# Altium PCB 风火轮（单面）.PcbDoc (part 3 of 4)
Units mil, origin at the board's own origin, x right, y up, seen from the top; angles counter-clockwise.
Board outline 3937.01 x 3937.01 mil, 2 copper layers (Top Layer, Bottom Layer); 108 components, 81 nets, 448 pads, 132 vias.
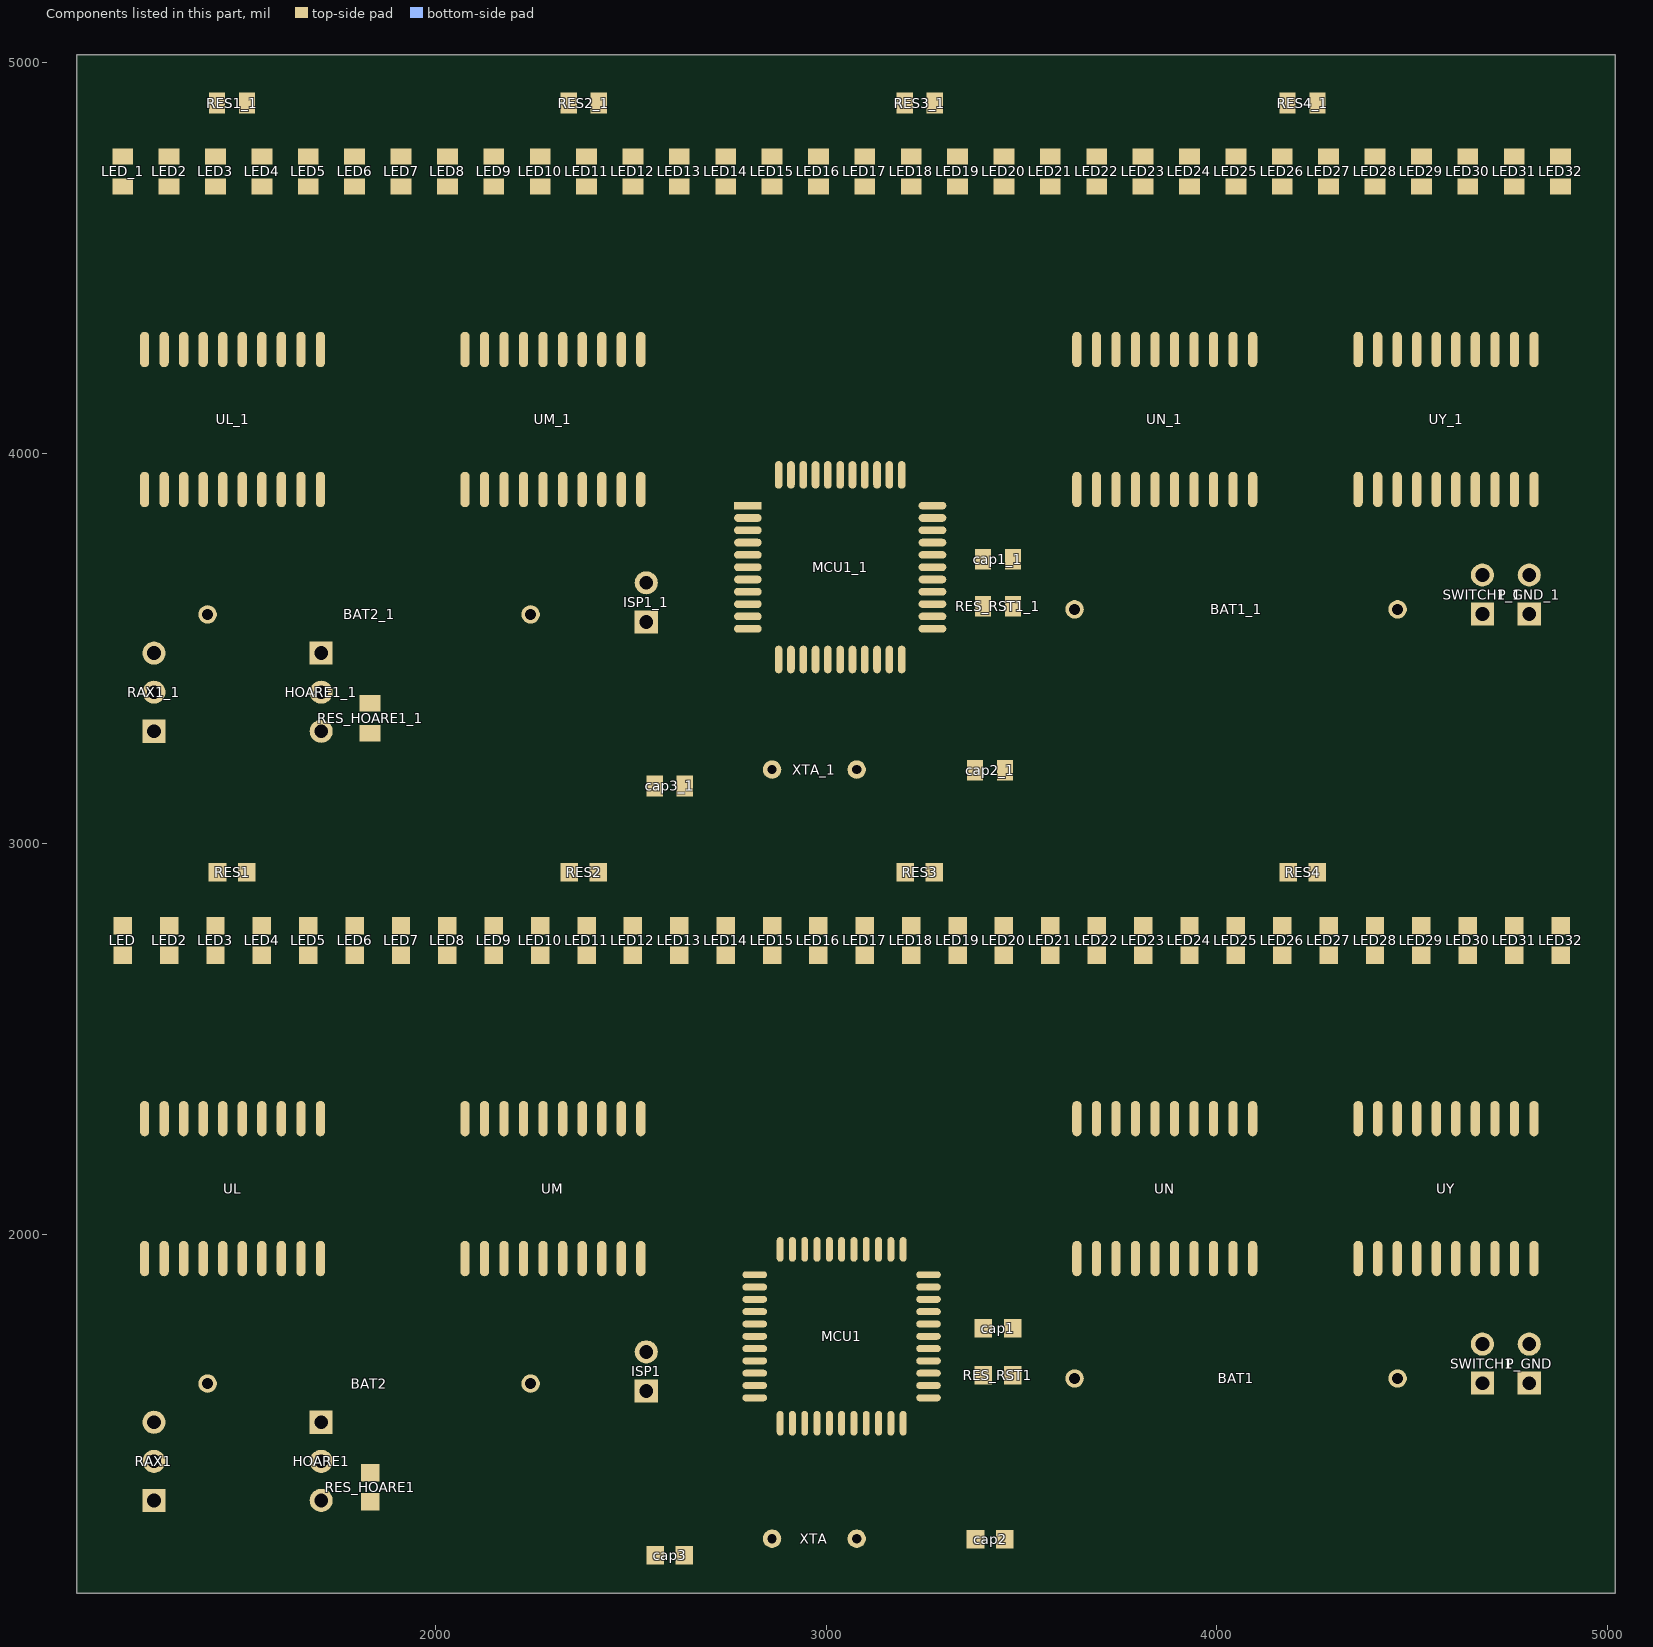
[diagram p3: the components of this part, seen from the top]

## Via types
v1: diameter 50, hole 28, Top Layer to Bottom Layer, 132 vias

## Nets (pads, with @x,y where several pads share a name; then routed paths per layer and width w, separated by ;. In a path a pad name is that pad's centre, name@x,y a point inside that pad or via, vN(x,y) a via of type N, cw(c..) or ccw(c..) an arc to the next point about the centre after c; other vN are vias at no path point) (continued)
copper on no net: | length 148539.7
  Top Layer w15: 2975.51,4037.69 2977.51,3965.53 ; 3008.5,3930.94 3008.5,4018.01
  Top Layer w20: 1200,4573.5 1200,4684.13 ; 1200,4758.94 1318.71,4758.94 1437.42,4758.94 1556.13,4758.94 1674.84,4758.94 1793.55,4758.94 1912.26,4758.94 2030.97,4758.94 ; 1442.6,4764.12 1442.6,4896.5 ; 1517.4,4896.5 1517.4,4985.5 ; v1(1695,3103.5) 2313,3103.5 v1(2416,3206.5) ; 1706,4265.64 1706,4363.5 v1(1712,4369.5) v1@1712,4360.5 ; 1708,3288.5 1829.06,3288.5 ; 1833,3436.5 1833,3359.37 2519.87,3359.37 2774.51,3614.02 2817.56,3614.02 ; 2076,3863.5 2076,3907.37 ; 2126,3907.37 2126,3983.5 ; 2149.68,4758.94 2268.39,4758.94 2387.1,4758.94 ; 2176,3907.37 2176,3982.36 2325.15,4131.5 2917.28,4131.5 2975.51,4073.27 2975.51,4037.69 ; 2226,3907.37 2226,3989.93 2337.57,4101.5 2904.85,4101.5 2942.87,4063.48 2942.87,3966.06 2947,3934.5 ; 2276,3907.37 2276,3997.5 2350,4071.5 2892.43,4071.5 2912.52,4051.41 2912.52,3942.5 ; 2326,3907.37 2326,4004.5 2360.48,4038.98 2838.52,4038.98 v1(2855.13,4022.38) 2874,4003.5 2874,3947.02 ; 2342.6,4896.5 2342.6,4803.44 2387.1,4758.94 ; 2377.14,3906.23 2376,3907.37 2376,4001.5 2383.48,4008.98 2638.37,4008.98 2690,3957.36 ; 2429.43,3970.93 2437.48,3978.98 2625.95,3978.98 2651,3953.93 2651,3897.93 2714.44,3834.49 ; 2476,3792.5 2484,3792.5 v1(2502,3774.5) ; v1@2498,3770.5 v1@2504,3764.5 ; 2505.87,3399.37 2750.51,3644.02 2816.06,3644.02 2817.56,3645.51 ; 2528,4267.64 v1(2528,4351.5) ; 2540,3568.5 2596,3568.5 2704.5,3677.01 2817.56,3677.01 ; 2540,3668.5 2600,3668.5 2671.5,3740 ; 2565.27,3133.21 2565.27,3114.23 2590.01,3089.5 3428.99,3089.5 3457.4,3117.91 3457.4,3243.1 3407,3293.5 ; 2666,3780.5 2688.49,3802.99 ; 2670.5,3133 2665.4,3138.1 ; 2733.52,3865.98 2690,3909.5 2690,3957.36 ; 2817.56,3771.5 2881.01,3771.5 v1(2887,3765.5) ; 2846,3130.5 2678.1,3130.5 2670.5,3138.1 ; 2866,3328.5 2943.5,3406.01 2943.5,3484.05 2945.51,3486.06 ; v1(2896,3857.5) 2914.02,3875.52 2914.02,3930.94 ; 2945.51,3930.94 2945.51,3801.99 v1(2950,3797.5) ; v1(2973,3577.5) 2973,3571.44 3008.5,3535.93 3008.5,3486.06 3008.5,3428 ; 2977.01,3385.5 2977.01,3486.06 ; 2977.01,3930.94 2977.01,3889.5 v1(3010,3856.5) ; 2977.51,3929.94 2977.51,3965.53 ; 2980.64,4758.94 2861.93,4758.94 2743.22,4758.94 2624.52,4758.94 2505.81,4758.94 2387.1,4758.94 ; 3008.5,4018.01 v1(3035,4044.5) ; v1(3021,3628.5) 3021,3565.86 3049.31,3537.56 ; 3051.95,3537.56 3066.01,3523.5 ; 3071.5,3486.06 3071.5,3523.5 ; 3078.54,3190.5 3080.54,3188.5 3082.54,3188.5 ; v1@3082,3562.86 3102.99,3541.87 3102.99,3486.06 ; 3082.54,3185.5 3082.54,3188.5 ; 3099.35,4758.94 3218.06,4758.94 3336.77,4758.94 3455.48,4758.94 3574.19,4758.94 3692.9,4758.94 3811.61,4758.94 3930.32,4758.94 ; 3134.49,3486.06 3134.49,3433.02 3155.5,3412 3555.5,3412 v1(3599,3368.5) ; 3168.62,3487.56 v1@3168.62,3584.5 ; 3202.6,4774.4 3202.6,4896.5 ; 3382.6,3188.5 3082.54,3188.5 ; 3391.1,3740 3402.6,3728.5 3402.6,4159.1 v1(3573,4329.5) ; 3402.6,3608.5 3521.6,3489.5 3610,3489.5 v1@3676,3423.5 ; 3459.4,3190.5 3596,3190.5 3680,3274.5 3680,3390.5 ; 3477.4,3608.5 3477.4,3728.5 ; 3523,3728.5 3477.4,3728.5 ; 3642,3907.37 3642,3656.42 3679.85,3618.57 3679.85,3399.35 ; 3742,3907.37 v1(3742,3760.5) 3737,3755.5 3737,3268.5 3897,3108.5 ; v1(3782,3661.5) 3792,3661.5 3792,3907.37 ; 3892,3301.5 3971,3222.5 4859.69,3222.5 4904.69,3267.5 4904.69,4067.82 4864,4108.5 4627,4108.5 4612,4093.5 4612,3907.37 ; 3947,3192.5 4876,3192.5 4934.69,3251.19 4934.69,4084.82 4881,4138.5 4582,4138.5 4562,4118.5 4562,3907.37 ; 3992,3907.37 v1(3992,3984.5) ; v1(4007,3368.5) 4753,3368.5 v1(4816,3431.5) ; 4049.03,4758.94 4167.74,4758.94 4286.45,4758.94 4405.16,4758.94 4523.87,4758.94 4642.58,4758.94 4761.29,4758.94 4880,4758.94 ; 4092,4265.64 v1(4092,4356.5) ; v1@4138,3328.5 v1(4816,3328.5) ; 4182.6,4773.8 4182.6,4896.5 ; 4219.96,4985.5 cw(c4219.96,4937.46) v1@4253.93,4971.43 ; 4262,4901.1 v1@4262,4964.5 ; 4462,3907.37 4462,4158.5 4502,4198.5 4965,4198.5 4994.69,4168.82 4994.69,3144.19 ; 4512,3907.37 4512,4147.5 4533,4168.5 4938,4168.5 4964.69,4141.82 4964.69,3235.62 4878.57,3149.5 ; 4662,3907.37 4662,4049.5 v1@4671.28,4058.78 ; v1(4668.43,4053.78) 4668.43,4055.93 v1@4671.28,4058.78 ; v1@4684,4071.5 v1@4671.28,4058.78 ; v1(4711,4011.5) 4711,4004.5 4712,3999.5 4712,3911.37 ; 4763,3916.37 v1@4763,4002.5 ; 4812,4265.64 4812,4347.5 ; v1@1705.61,3092.9 cw(c1731.21,3067.29) 1731.21,3103.5 ; v1@1705.61,3092.9 cw(c1731.21,3067.29) 1731.21,3103.5 ; v1@1705.61,3092.9 cw(c1731.21,3067.29) 1731.21,3103.5 ; v1@1705.61,3092.9 cw(c1731.21,3067.29) 1731.21,3103.5 ; v1@1705.61,3114.11 ccw(c1731.21,3139.72) 1731.21,3103.5 ; v1@1705.61,3114.11 ccw(c1731.21,3139.72) 1731.21,3103.5 ; v1@1705.61,3114.11 ccw(c1731.21,3139.72) 1731.21,3103.5 ; v1@1705.61,3114.11 ccw(c1731.21,3139.72) 1731.21,3103.5 ; 1706,4318.81 cw(c1762.7,4318.81) v1@1722.61,4358.9 ; 1706,4318.81 cw(c1762.7,4318.81) v1@1722.61,4358.9 ; 1706,4318.81 cw(c1762.7,4318.81) v1@1722.61,4358.9 ; 1706,4318.81 cw(c1762.7,4318.81) v1@1722.61,4358.9 ; 1718.27,3278.23 cw(c1743.07,3253.43) 1743.07,3288.5 ; 1718.27,3278.23 cw(c1743.07,3253.43) 1743.07,3288.5 ; 1718.27,3278.23 cw(c1743.07,3253.43) 1743.07,3288.5 ; 1718.27,3278.23 cw(c1743.07,3253.43) 1743.07,3288.5 ; 1718.27,3298.78 ccw(c1743.07,3323.58) 1743.07,3288.5 ; 1718.27,3298.78 ccw(c1743.07,3323.58) 1743.07,3288.5 ; 1718.27,3298.78 ccw(c1743.07,3323.58) 1743.07,3288.5 ; 1718.27,3298.78 ccw(c1743.07,3323.58) 1743.07,3288.5 ; 2390.39,3180.9 ccw(c2364.79,3206.5) v1@2401,3206.5 ; 2390.39,3180.9 cw(c2416,3155.29) v1@2416,3191.5 ; 2390.39,3180.9 ccw(c2364.79,3206.5) v1@2401,3206.5 ; 2390.39,3180.9 cw(c2416,3155.29) v1@2416,3191.5 ; 2390.39,3180.9 ccw(c2364.79,3206.5) v1@2401,3206.5 ; 2390.39,3180.9 cw(c2416,3155.29) v1@2416,3191.5 ; 2390.39,3180.9 ccw(c2364.79,3206.5) v1@2401,3206.5 ; 2390.39,3180.9 cw(c2416,3155.29) v1@2416,3191.5 ; v1@2517.39,4340.9 cw(c2491.79,4315.29) 2528,4315.29 ; v1@2517.39,4340.9 cw(c2491.79,4315.29) 2528,4315.29 ; v1@2517.39,4340.9 cw(c2491.79,4315.29) 2528,4315.29 ; v1@2517.39,4340.9 cw(c2491.79,4315.29) 2528,4315.29 ; 2528,4315.29 cw(c2564.21,4315.29) v1@2538.61,4340.9 ; 2528,4315.29 cw(c2564.21,4315.29) v1@2538.61,4340.9 ; 2528,4315.29 cw(c2564.21,4315.29) v1@2538.61,4340.9 ; 2528,4315.29 cw(c2564.21,4315.29) v1@2538.61,4340.9 ; 2539.34,3978.98 cw(c2539.34,3872.85) v1@2614.39,3947.9 ; 2539.34,3978.98 cw(c2539.34,3872.85) v1@2614.39,3947.9 ; 2539.34,3978.98 cw(c2539.34,3872.85) v1@2614.39,3947.9 ; 2539.34,3978.98 cw(c2539.34,3872.85) v1@2614.39,3947.9 ; 2553.81,3554.7 cw(c2587.14,3521.36) 2587.14,3568.5 ; 2553.81,3554.7 cw(c2587.14,3521.36) 2587.14,3568.5 ; 2553.81,3554.7 cw(c2587.14,3521.36) 2587.14,3568.5 ; 2553.81,3554.7 cw(c2587.14,3521.36) 2587.14,3568.5 ; 2553.81,3582.31 ccw(c2587.14,3615.65) 2587.14,3568.5 ; 2553.81,3582.31 ccw(c2587.14,3615.65) 2587.14,3568.5 ; 2553.81,3582.31 ccw(c2587.14,3615.65) 2587.14,3568.5 ; 2553.81,3582.31 ccw(c2587.14,3615.65) 2587.14,3568.5 ; 2553.81,3654.7 cw(c2587.14,3621.36) 2587.14,3668.5 ; 2553.81,3654.7 cw(c2587.14,3621.36) 2587.14,3668.5 ; 2553.81,3654.7 cw(c2587.14,3621.36) 2587.14,3668.5 ; 2553.81,3654.7 cw(c2587.14,3621.36) 2587.14,3668.5 ; 2553.81,3682.31 ccw(c2587.14,3715.65) 2587.14,3668.5 ; 2553.81,3682.31 ccw(c2587.14,3715.65) 2587.14,3668.5 ; 2553.81,3682.31 ccw(c2587.14,3715.65) 2587.14,3668.5 ; 2553.81,3682.31 ccw(c2587.14,3715.65) 2587.14,3668.5 ; 2557.34,3142.06 cw(c2538.17,3122.9) 2565.27,3122.9 ; 2557.34,3142.06 cw(c2538.17,3122.9) 2565.27,3122.9 ; 2557.34,3142.06 cw(c2538.17,3122.9) 2565.27,3122.9 ; 2557.34,3142.06 cw(c2538.17,3122.9) 2565.27,3122.9 ; 2569.14,3143.77 ccw(c2598.12,3128.03) 2574.8,3104.71 ; 2569.14,3143.77 ccw(c2598.12,3128.03) 2574.8,3104.71 ; 2569.14,3143.77 ccw(c2598.12,3128.03) 2574.8,3104.71 ; 2569.14,3143.77 ccw(c2598.12,3128.03) 2574.8,3104.71 ; 2587.63,3978.98 cw(c2587.63,3921.13) v1@2628.54,3962.04 ; 2587.63,3978.98 cw(c2587.63,3921.13) v1@2628.54,3962.04 ; 2587.63,3978.98 cw(c2587.63,3921.13) v1@2628.54,3962.04 ; 2587.63,3978.98 cw(c2587.63,3921.13) v1@2628.54,3962.04 ; 2641.86,3135.71 cw(c2652.94,3106.86) 2674.79,3128.71 ; 2641.86,3135.71 cw(c2652.94,3106.86) 2674.79,3128.71 ; 2641.86,3135.71 cw(c2652.94,3106.86) 2674.79,3128.71 ; 2641.86,3135.71 cw(c2652.94,3106.86) 2674.79,3128.71 ; 2648.8,3152.3 ccw(c2670.5,3161.78) 2670.5,3138.1 ; 2648.8,3152.3 ccw(c2670.5,3161.78) 2670.5,3138.1 ; 2648.8,3152.3 ccw(c2670.5,3161.78) 2670.5,3138.1 ; 2648.8,3152.3 ccw(c2670.5,3161.78) 2670.5,3138.1 ; 2649.44,3150.45 ccw(c2665.4,3154.59) 2665.4,3138.1 ; 2649.44,3150.45 ccw(c2665.4,3154.59) 2665.4,3138.1 ; 2649.44,3150.45 ccw(c2665.4,3154.59) 2665.4,3138.1 ; 2649.44,3150.45 ccw(c2665.4,3154.59) 2665.4,3138.1 ; 2649.44,3150.45 ccw(c2665.4,3154.59) 2665.4,3138.1 ; 2649.44,3150.45 ccw(c2665.4,3154.59) 2665.4,3138.1 ; 2649.44,3150.45 ccw(c2665.4,3154.59) 2665.4,3138.1 ; 2649.44,3150.45 ccw(c2665.4,3154.59) 2665.4,3138.1 ; 2665.4,3138.1 2639.4,3164.1 2639.4,3138.1 2665.4,3138.1 ; 2665.4,3138.1 2670.5,3138.1 ; 2690,3936.93 ccw(c2715.43,3936.93) v1@2714.89,3911.51 ; 2690,3936.93 ccw(c2715.43,3936.93) v1@2714.89,3911.51 ; 2690,3936.93 ccw(c2715.43,3936.93) v1@2714.89,3911.51 ; 2690,3936.93 ccw(c2715.43,3936.93) v1@2714.89,3911.51 ; 2690,3957.36 ccw(c2715.86,3957.36) v1@2715.32,3931.5 ; 2690,3957.36 ccw(c2715.86,3957.36) v1@2715.32,3931.5 ; 2690,3957.36 ccw(c2715.86,3957.36) v1@2715.32,3931.5 ; 2690,3957.36 ccw(c2715.86,3957.36) v1@2715.32,3931.5 ; 2778.82,4038.98 cw(c2778.82,3946.07) v1@2844.52,4011.77 ; 2778.82,4038.98 cw(c2778.82,3946.07) v1@2844.52,4011.77 ; 2778.82,4038.98 cw(c2778.82,3946.07) v1@2844.52,4011.77 ; 2778.82,4038.98 cw(c2778.82,3946.07) v1@2844.52,4011.77 ; 2827.11,4038.98 cw(c2827.11,3994.36) v1@2858.66,4025.91 ; 2827.11,4038.98 cw(c2827.11,3994.36) v1@2858.66,4025.91 ; 2827.11,4038.98 cw(c2827.11,3994.36) v1@2858.66,4025.91 ; 2827.11,4038.98 cw(c2827.11,3994.36) v1@2858.66,4025.91 ; 2836.32,3771.5 cw(c2836.32,3714.82) v1@2876.39,3754.9 ; 2836.32,3771.5 cw(c2836.32,3714.82) v1@2876.39,3754.9 ; 2836.32,3771.5 cw(c2836.32,3714.82) v1@2876.39,3754.9 ; 2836.32,3771.5 cw(c2836.32,3714.82) v1@2876.39,3754.9 ; v1@2939.39,3808.11 ccw(c2924.62,3822.88) 2945.51,3822.88 ; v1@2939.39,3808.11 ccw(c2924.62,3822.88) 2945.51,3822.88 ; v1@2939.39,3808.11 ccw(c2924.62,3822.88) 2945.51,3822.88 ; v1@2939.39,3808.11 ccw(c2924.62,3822.88) 2945.51,3822.88 ; 2945.51,3844.55 ccw(c2997.05,3844.55) v1@2960.61,3808.11 ; 2945.51,3844.55 ccw(c2997.05,3844.55) v1@2960.61,3808.11 ; 2945.51,3844.55 ccw(c2997.05,3844.55) v1@2960.61,3808.11 ; 2945.51,3844.55 ccw(c2997.05,3844.55) v1@2960.61,3808.11 ; 2975.87,3908.31 ccw(c3018.52,3908.31) 2988.36,3878.14 ; 2975.87,3908.31 ccw(c3018.52,3908.31) 2988.36,3878.14 ; 2975.87,3908.31 ccw(c3018.52,3908.31) 2988.36,3878.14 ; 2975.87,3908.31 ccw(c3018.52,3908.31) 2988.36,3878.14 ; 2984.39,3882.11 ccw(c3010,3907.72) v1@3010,3871.5 ; 2984.39,3882.11 cw(c2958.79,3856.5) v1@2995,3856.5 ; 2984.39,3882.11 ccw(c3010,3907.72) v1@3010,3871.5 ; 2984.39,3882.11 cw(c2958.79,3856.5) v1@2995,3856.5 ; 2984.39,3882.11 ccw(c3010,3907.72) v1@3010,3871.5 ; 2984.39,3882.11 cw(c2958.79,3856.5) v1@2995,3856.5 ; 2984.39,3882.11 ccw(c3010,3907.72) v1@3010,3871.5 ; 2984.39,3882.11 cw(c2958.79,3856.5) v1@2995,3856.5 ; v1@3010.39,3617.9 cw(c2984.79,3592.29) 3021,3592.29 ; v1@3010.39,3617.9 cw(c2984.79,3592.29) 3021,3592.29 ; v1@3010.39,3617.9 cw(c2984.79,3592.29) 3021,3592.29 ; v1@3010.39,3617.9 cw(c2984.79,3592.29) 3021,3592.29 ; 3021,3592.29 cw(c3057.21,3592.29) v1@3031.61,3617.9 ; 3021,3592.29 cw(c3057.21,3592.29) v1@3031.61,3617.9 ; 3021,3592.29 cw(c3057.21,3592.29) v1@3031.61,3617.9 ; 3021,3592.29 cw(c3057.21,3592.29) v1@3031.61,3617.9 ; 3066.86,3522.65 cw(c3052.9,3508.7) 3072.64,3508.7 ; 3066.86,3522.65 cw(c3052.9,3508.7) 3072.64,3508.7 ; 3066.86,3522.65 cw(c3052.9,3508.7) 3072.64,3508.7 ; 3066.86,3522.65 cw(c3052.9,3508.7) 3072.64,3508.7 ; 3066.86,3522.65 cw(c3052.9,3508.7) 3072.64,3508.7 ; 3066.86,3522.65 cw(c3052.9,3508.7) 3072.64,3508.7 ; 3066.86,3522.65 cw(c3052.9,3508.7) 3072.64,3508.7 ; 3066.86,3522.65 cw(c3052.9,3508.7) 3072.64,3508.7 ; 3084.63,3196.6 ccw(c3104.18,3216.15) 3104.18,3188.5 ; 3084.63,3196.6 ccw(c3104.18,3216.15) 3104.18,3188.5 ; 3084.63,3196.6 ccw(c3104.18,3216.15) 3104.18,3188.5 ; 3084.63,3196.6 ccw(c3104.18,3216.15) 3104.18,3188.5 ; v1@3155.39,3573.9 cw(c3123.46,3541.96) 3168.62,3541.96 ; v1@3155.39,3573.9 cw(c3123.46,3541.96) 3168.62,3541.96 ; v1@3155.39,3573.9 cw(c3123.46,3541.96) 3168.62,3541.96 ; v1@3155.39,3573.9 cw(c3123.46,3541.96) 3168.62,3541.96 ; 3168.62,3554.62 cw(c3195.88,3554.62) v1@3176.61,3573.9 ; 3168.62,3554.62 cw(c3195.88,3554.62) v1@3176.61,3573.9 ; 3168.62,3554.62 cw(c3195.88,3554.62) v1@3176.61,3573.9 ; 3168.62,3554.62 cw(c3195.88,3554.62) v1@3176.61,3573.9 ; 3202.6,4799.32 ccw(c3257.26,4799.32) 3218.61,4760.66 ; 3202.6,4799.32 ccw(c3257.26,4799.32) 3218.61,4760.66 ; 3202.6,4799.32 ccw(c3257.26,4799.32) 3218.61,4760.66 ; 3202.6,4799.32 ccw(c3257.26,4799.32) 3218.61,4760.66 ; 3402.6,3594.88 cw(c3402.6,3562) 3425.85,3585.25 ; 3402.6,3594.88 cw(c3402.6,3562) 3425.85,3585.25 ; 3402.6,3594.88 cw(c3402.6,3562) 3425.85,3585.25 ; 3402.6,3594.88 cw(c3402.6,3562) 3425.85,3585.25 ; 3415.04,3607.32 ccw(c3442.22,3607.32) 3423,3588.1 ; 3415.04,3607.32 ccw(c3442.22,3607.32) 3423,3588.1 ; 3415.04,3607.32 ccw(c3442.22,3607.32) 3423,3588.1 ; 3415.04,3607.32 ccw(c3442.22,3607.32) 3423,3588.1 ; 3448.6,3198.48 ccw(c3427.37,3219.72) 3457.4,3219.72 ; 3448.6,3198.48 ccw(c3427.37,3219.72) 3457.4,3219.72 ; 3448.6,3198.48 ccw(c3427.37,3219.72) 3457.4,3219.72 ; 3448.6,3198.48 ccw(c3427.37,3219.72) 3457.4,3219.72 ; 3457.4,3219.72 ccw(c3487.44,3219.72) 3466.2,3198.48 ; 3457.4,3219.72 ccw(c3487.44,3219.72) 3466.2,3198.48 ; 3457.4,3219.72 ccw(c3487.44,3219.72) 3466.2,3198.48 ; 3457.4,3219.72 ccw(c3487.44,3219.72) 3466.2,3198.48 ; 3466.2,3180.89 cw(c3489.41,3157.67) 3489.41,3190.5 ; 3466.2,3180.89 cw(c3489.41,3157.67) 3489.41,3190.5 ; 3466.2,3180.89 cw(c3489.41,3157.67) 3489.41,3190.5 ; 3466.2,3180.89 cw(c3489.41,3157.67) 3489.41,3190.5 ; 3466.2,3198.48 ccw(c3485.46,3217.74) 3485.46,3190.5 ; 3466.2,3198.48 ccw(c3485.46,3217.74) 3485.46,3190.5 ; 3466.2,3198.48 ccw(c3485.46,3217.74) 3485.46,3190.5 ; 3466.2,3198.48 ccw(c3485.46,3217.74) 3485.46,3190.5 ; 3477.41,3728.5 ccw(c3477.41,3806.3) v1@3538.19,3757.75 ; 3477.41,3728.5 ccw(c3477.41,3806.3) v1@3538.19,3757.75 ; 3477.41,3728.5 ccw(c3477.41,3806.3) v1@3538.19,3757.75 ; 3477.41,3728.5 ccw(c3477.41,3806.3) v1@3538.19,3757.75 ; 3573.39,3394.11 ccw(c3599,3419.72) v1@3599,3383.5 ; 3573.39,3394.11 cw(c3547.79,3368.5) v1@3584,3368.5 ; 3573.39,3394.11 ccw(c3599,3419.72) v1@3599,3383.5 ; 3573.39,3394.11 cw(c3547.79,3368.5) v1@3584,3368.5 ; 3573.39,3394.11 ccw(c3599,3419.72) v1@3599,3383.5 ; 3573.39,3394.11 cw(c3547.79,3368.5) v1@3584,3368.5 ; 3573.39,3394.11 ccw(c3599,3419.72) v1@3599,3383.5 ; 3573.39,3394.11 cw(c3547.79,3368.5) v1@3584,3368.5 ; v1@3731.39,3771.11 ccw(c3705.79,3796.72) 3742,3796.72 ; v1@3731.39,3771.11 ccw(c3705.79,3796.72) 3742,3796.72 ; v1@3731.39,3771.11 ccw(c3705.79,3796.72) 3742,3796.72 ; v1@3731.39,3771.11 ccw(c3705.79,3796.72) 3742,3796.72 ; 3737,3712.22 cw(c3790.28,3712.22) v1@3752.61,3749.9 ; 3737,3712.22 cw(c3790.28,3712.22) v1@3752.61,3749.9 ; 3737,3712.22 cw(c3790.28,3712.22) v1@3752.61,3749.9 ; 3737,3712.22 cw(c3790.28,3712.22) v1@3752.61,3749.9 ; 3742,3796.72 ccw(c3778.21,3796.72) v1@3752.61,3771.11 ; 3742,3796.72 ccw(c3778.21,3796.72) v1@3752.61,3771.11 ; 3742,3796.72 ccw(c3778.21,3796.72) v1@3752.61,3771.11 ; 3742,3796.72 ccw(c3778.21,3796.72) v1@3752.61,3771.11 ; v1@3771.39,3672.11 ccw(c3721.64,3721.86) 3792,3721.86 ; v1@3771.39,3672.11 ccw(c3721.64,3721.86) 3792,3721.86 ; v1@3771.39,3672.11 ccw(c3721.64,3721.86) 3792,3721.86 ; v1@3771.39,3672.11 ccw(c3721.64,3721.86) 3792,3721.86 ; v1@3981.39,3973.9 cw(c3955.79,3948.29) 3992,3948.29 ; v1@3981.39,3973.9 cw(c3955.79,3948.29) 3992,3948.29 ; v1@3981.39,3973.9 cw(c3955.79,3948.29) 3992,3948.29 ; v1@3981.39,3973.9 cw(c3955.79,3948.29) 3992,3948.29 ; 3992,3948.29 cw(c4028.21,3948.29) v1@4002.61,3973.9 ; 3992,3948.29 cw(c4028.21,3948.29) v1@4002.61,3973.9 ; 3992,3948.29 cw(c4028.21,3948.29) v1@4002.61,3973.9 ; 3992,3948.29 cw(c4028.21,3948.29) v1@4002.61,3973.9 ; v1@4017.61,3357.9 cw(c4043.21,3332.29) 4043.21,3368.5 ; v1@4017.61,3357.9 cw(c4043.21,3332.29) 4043.21,3368.5 ; v1@4017.61,3357.9 cw(c4043.21,3332.29) 4043.21,3368.5 ; v1@4017.61,3357.9 cw(c4043.21,3332.29) 4043.21,3368.5 ; v1@4017.61,3379.11 ccw(c4043.21,3404.72) 4043.21,3368.5 ; v1@4017.61,3379.11 ccw(c4043.21,3404.72) 4043.21,3368.5 ; v1@4017.61,3379.11 ccw(c4043.21,3404.72) 4043.21,3368.5 ; v1@4017.61,3379.11 ccw(c4043.21,3404.72) 4043.21,3368.5 ; v1@4081.39,4345.9 cw(c4055.79,4320.29) 4092,4320.29 ; v1@4081.39,4345.9 cw(c4055.79,4320.29) 4092,4320.29 ; v1@4081.39,4345.9 cw(c4055.79,4320.29) 4092,4320.29 ; v1@4081.39,4345.9 cw(c4055.79,4320.29) 4092,4320.29 ; 4092,4320.29 cw(c4128.21,4320.29) v1@4102.61,4345.9 ; 4092,4320.29 cw(c4128.21,4320.29) v1@4102.61,4345.9 ; 4092,4320.29 cw(c4128.21,4320.29) v1@4102.61,4345.9 ; 4092,4320.29 cw(c4128.21,4320.29) v1@4102.61,4345.9 ; v1@4156.61,3304.9 cw(c4213.6,3247.91) 4213.6,3328.5 ; v1@4156.61,3304.9 cw(c4213.6,3247.91) 4213.6,3328.5 ; v1@4156.61,3304.9 cw(c4213.6,3247.91) 4213.6,3328.5 ; v1@4156.61,3304.9 cw(c4213.6,3247.91) 4213.6,3328.5 ; 4167.2,4760.66 ccw(c4130.01,4797.85) 4182.6,4797.85 ; 4167.2,4760.66 ccw(c4130.01,4797.85) 4182.6,4797.85 ; 4167.2,4760.66 ccw(c4130.01,4797.85) 4182.6,4797.85 ; 4167.2,4760.66 ccw(c4130.01,4797.85) 4182.6,4797.85 ; 4252.14,4902.95 ccw(c4228.34,4926.75) 4262,4926.75 ; 4252.14,4902.95 ccw(c4228.34,4926.75) 4262,4926.75 ; 4252.14,4902.95 ccw(c4228.34,4926.75) 4262,4926.75 ; 4252.14,4902.95 ccw(c4228.34,4926.75) 4262,4926.75 ; v1@4253.93,4971.43 cw(c4234.44,4951.95) 4262,4951.95 ; v1@4253.93,4971.43 cw(c4234.44,4951.95) 4262,4951.95 ; v1@4253.93,4971.43 cw(c4234.44,4951.95) 4262,4951.95 ; v1@4253.93,4971.43 cw(c4234.44,4951.95) 4262,4951.95 ; 4662,4002.05 cw(c4720.16,4002.05) v1@4679.03,4043.18 ; 4662,4002.05 cw(c4720.16,4002.05) v1@4679.03,4043.18 ; 4662,4002.05 cw(c4720.16,4002.05) v1@4679.03,4043.18 ; 4662,4002.05 cw(c4720.16,4002.05) v1@4679.03,4043.18 ; v1@4700.39,4000.9 cw(c4672.37,3972.88) 4712,3972.88 ; v1@4700.39,4000.9 cw(c4672.37,3972.88) 4712,3972.88 ; v1@4700.39,4000.9 cw(c4672.37,3972.88) 4712,3972.88 ; v1@4700.39,4000.9 cw(c4672.37,3972.88) 4712,3972.88 ; 4712,3977.7 cw(c4744.8,3977.7) v1@4721.61,4000.9 ; 4712,3977.7 cw(c4744.8,3977.7) v1@4721.61,4000.9 ; 4712,3977.7 cw(c4744.8,3977.7) v1@4721.61,4000.9 ; 4712,3977.7 cw(c4744.8,3977.7) v1@4721.61,4000.9 ; 4763,3955.98 cw(c4826.53,3955.98) v1@4781.61,4000.9 ; 4763,3955.98 cw(c4826.53,3955.98) v1@4781.61,4000.9 ; 4763,3955.98 cw(c4826.53,3955.98) v1@4781.61,4000.9 ; 4763,3955.98 cw(c4826.53,3955.98) v1@4781.61,4000.9 ; 4779.79,3328.5 ccw(c4779.79,3364.72) v1@4805.39,3339.11 ; 4779.79,3328.5 cw(c4779.79,3292.29) v1@4805.39,3317.9 ; 4779.79,3328.5 ccw(c4779.79,3364.72) v1@4805.39,3339.11 ; 4779.79,3328.5 cw(c4779.79,3292.29) v1@4805.39,3317.9 ; 4779.79,3328.5 ccw(c4779.79,3364.72) v1@4805.39,3339.11 ; 4779.79,3328.5 cw(c4779.79,3292.29) v1@4805.39,3317.9 ; 4779.79,3328.5 ccw(c4779.79,3364.72) v1@4805.39,3339.11 ; 4779.79,3328.5 cw(c4779.79,3292.29) v1@4805.39,3317.9 ; 4790.39,3405.9 ccw(c4764.79,3431.5) v1@4801,3431.5 ; 4790.39,3405.9 cw(c4816,3380.29) v1@4816,3416.5 ; 4790.39,3405.9 ccw(c4764.79,3431.5) v1@4801,3431.5 ; 4790.39,3405.9 cw(c4816,3380.29) v1@4816,3416.5 ; 4790.39,3405.9 ccw(c4764.79,3431.5) v1@4801,3431.5 ; 4790.39,3405.9 cw(c4816,3380.29) v1@4816,3416.5 ; 4790.39,3405.9 ccw(c4764.79,3431.5) v1@4801,3431.5 ; 4790.39,3405.9 cw(c4816,3380.29) v1@4816,3416.5 ; 4812,4305.91 cw(c4892.6,4305.91) v1@4835.61,4362.9 ; 4812,4305.91 cw(c4892.6,4305.91) v1@4835.61,4362.9 ; 4812,4305.91 cw(c4892.6,4305.91) v1@4835.61,4362.9
  Top Layer w21: 2688.49,3802.99 2817.56,3802.99 ; 2714.44,3834.49 2817.56,3834.49 ; 2733.52,3865.98 2817.56,3865.98
  Top Layer w22: 2671.5,3740 2817.56,3740 ; 2846,3130.5 2866,3150.5 ; 3008.5,3428 3143,3293.5 3407,3293.5
  Top Layer w24: 3071.5,3846.01 3071.5,3930.94 ; 3177.5,3740 3262.44,3740 3391.1,3740 ; 3692,3907.37 v1(3692,4038.5) 3692,4128.5 3720,4156.5 4368,4156.5 4412,4112.5 4412,3907.37 ; v1@3792,3661.5 3783,3652.5 3783,3285.68 3919.17,3149.5 4878.57,3149.5 ; v1@3840,3632.5 3840,3299.5 3947,3192.5 ; v1@3842,3647.04 3842,3907.37 ; 3892,3301.5 3892,3907.37 ; 3897,3108.5 3902,3103.5 4952,3103.5 4992.69,3144.19 ; 3942,3907.37 3942,3324.5 4001,3265.5 4827,3265.5 4865,3303.5 4865,4059.19 4852.69,4071.5 v1@4684,4071.5 ; v1(4046,4097.5) 4046,3912.5 4047,3911.5 ; 3352.49,3740 cw(c3352.49,3679.58) 3395.22,3722.3 ; 3352.49,3740 cw(c3352.49,3679.58) 3395.22,3722.3 ; 3352.49,3740 cw(c3352.49,3679.58) 3395.22,3722.3 ; 3352.49,3740 cw(c3352.49,3679.58) 3395.22,3722.3 ; v1@3682.81,4029.31 cw(c3660.62,4007.12) 3692,4007.12 ; v1@3682.81,4029.31 cw(c3660.62,4007.12) 3692,4007.12 ; v1@3682.81,4029.31 cw(c3660.62,4007.12) 3692,4007.12 ; v1@3682.81,4029.31 cw(c3660.62,4007.12) 3692,4007.12 ; v1@3682.81,4047.7 ccw(c3660.62,4069.89) 3692,4069.89 ; v1@3682.81,4047.7 ccw(c3660.62,4069.89) 3692,4069.89 ; v1@3682.81,4047.7 ccw(c3660.62,4069.89) 3692,4069.89 ; v1@3682.81,4047.7 ccw(c3660.62,4069.89) 3692,4069.89 ; 3692,4007.12 cw(c3723.38,4007.12) v1@3701.19,4029.31 ; 3692,4007.12 cw(c3723.38,4007.12) v1@3701.19,4029.31 ; 3692,4007.12 cw(c3723.38,4007.12) v1@3701.19,4029.31 ; 3692,4007.12 cw(c3723.38,4007.12) v1@3701.19,4029.31 ; 3692,4069.89 ccw(c3723.38,4069.89) v1@3701.19,4047.7 ; 3692,4069.89 ccw(c3723.38,4069.89) v1@3701.19,4047.7 ; 3692,4069.89 ccw(c3723.38,4069.89) v1@3701.19,4047.7 ; 3692,4069.89 ccw(c3723.38,4069.89) v1@3701.19,4047.7 ; v1@3772.81,3652.31 cw(c3748.2,3627.7) 3783,3627.7 ; v1@3772.81,3652.31 cw(c3748.2,3627.7) 3783,3627.7 ; v1@3772.81,3652.31 cw(c3748.2,3627.7) 3783,3627.7 ; v1@3772.81,3652.31 cw(c3748.2,3627.7) 3783,3627.7 ; 3783,3632.53 cw(c3810.97,3632.53) v1@3791.19,3652.31 ; 3783,3632.53 cw(c3810.97,3632.53) v1@3791.19,3652.31 ; 3783,3632.53 cw(c3810.97,3632.53) v1@3791.19,3652.31 ; 3783,3632.53 cw(c3810.97,3632.53) v1@3791.19,3652.31 ; v1@3828.81,3623.31 cw(c3801.79,3596.29) 3840,3596.29 ; v1@3828.81,3623.31 cw(c3801.79,3596.29) 3840,3596.29 ; v1@3828.81,3623.31 cw(c3801.79,3596.29) 3840,3596.29 ; v1@3828.81,3623.31 cw(c3801.79,3596.29) 3840,3596.29 ; v1@3828.81,3641.7 ccw(c3796.96,3673.55) 3842,3673.55 ; v1@3828.81,3641.7 ccw(c3796.96,3673.55) 3842,3673.55 ; v1@3828.81,3641.7 ccw(c3796.96,3673.55) 3842,3673.55 ; v1@3828.81,3641.7 ccw(c3796.96,3673.55) 3842,3673.55 ; 3840,3605.95 cw(c3864.56,3605.95) v1@3847.19,3623.31 ; 3840,3605.95 cw(c3864.56,3605.95) v1@3847.19,3623.31 ; 3840,3605.95 cw(c3864.56,3605.95) v1@3847.19,3623.31 ; 3840,3605.95 cw(c3864.56,3605.95) v1@3847.19,3623.31 ; v1@3882.81,3654.31 cw(c3860.62,3632.12) 3892,3632.12 ; v1@3882.81,3654.31 cw(c3860.62,3632.12) 3892,3632.12 ; v1@3882.81,3654.31 cw(c3860.62,3632.12) 3892,3632.12 ; v1@3882.81,3654.31 cw(c3860.62,3632.12) 3892,3632.12 ; v1@3882.81,3672.7 ccw(c3860.62,3694.89) 3892,3694.89 ; v1@3882.81,3672.7 ccw(c3860.62,3694.89) 3892,3694.89 ; v1@3882.81,3672.7 ccw(c3860.62,3694.89) 3892,3694.89 ; v1@3882.81,3672.7 ccw(c3860.62,3694.89) 3892,3694.89 ; 3892,3632.12 cw(c3923.38,3632.12) v1@3901.19,3654.31 ; 3892,3632.12 cw(c3923.38,3632.12) v1@3901.19,3654.31 ; 3892,3632.12 cw(c3923.38,3632.12) v1@3901.19,3654.31 ; 3892,3632.12 cw(c3923.38,3632.12) v1@3901.19,3654.31 ; 3892,3694.89 ccw(c3923.38,3694.89) v1@3901.19,3672.7 ; 3892,3694.89 ccw(c3923.38,3694.89) v1@3901.19,3672.7 ; 3892,3694.89 ccw(c3923.38,3694.89) v1@3901.19,3672.7 ; 3892,3694.89 ccw(c3923.38,3694.89) v1@3901.19,3672.7 ; v1@4036.81,4088.31 cw(c4014.62,4066.12) 4046,4066.12 ; v1@4036.81,4088.31 cw(c4014.62,4066.12) 4046,4066.12 ; v1@4036.81,4088.31 cw(c4014.62,4066.12) 4046,4066.12 ; v1@4036.81,4088.31 cw(c4014.62,4066.12) 4046,4066.12 ; 4046,4066.12 cw(c4077.38,4066.12) v1@4055.19,4088.31 ; 4046,4066.12 cw(c4077.38,4066.12) v1@4055.19,4088.31 ; 4046,4066.12 cw(c4077.38,4066.12) v1@4055.19,4088.31 ; 4046,4066.12 cw(c4077.38,4066.12) v1@4055.19,4088.31 ; v1@4677.62,4044.59 cw(c4742.59,3979.62) 4742.59,4071.5 ; v1@4677.62,4044.59 cw(c4742.59,3979.62) 4742.59,4071.5 ; v1@4677.62,4044.59 cw(c4742.59,3979.62) 4742.59,4071.5 ; v1@4677.62,4044.59 cw(c4742.59,3979.62) 4742.59,4071.5
  Top Layer w25: v1@2126,3813.5 2126,3907.37 ; v1@2176,3742.5 2176,3907.37 ; v1@2226,3812.08 2226,3907.37 ; v1@2276,3739.5 2276,3907.37 ; v1@2326,3816.65 2326,3907.37 ; 3642,4265.64 3642,4217.5 3663,4196.5 3678.04,4196.5 3678.54,4197 3705.46,4197 3705.96,4196.5 4351,4196.5 4362,4207.5 4362,4265.64 ; v1@2114.16,3819.34 ccw(c2085.58,3847.92) 2126,3847.92 ; v1@2114.16,3819.34 ccw(c2085.58,3847.92) 2126,3847.92 ; v1@2114.16,3819.34 ccw(c2085.58,3847.92) 2126,3847.92 ; v1@2114.16,3819.34 ccw(c2085.58,3847.92) 2126,3847.92 ; v1@2162.16,3751.34 ccw(c2128.75,3784.75) 2176,3784.75 ; v1@2162.16,3751.34 ccw(c2128.75,3784.75) 2176,3784.75 ; v1@2162.16,3751.34 ccw(c2128.75,3784.75) 2176,3784.75 ; v1@2162.16,3751.34 ccw(c2128.75,3784.75) 2176,3784.75 ; v1@2218.73,3819.34 ccw(c2201.19,3836.89) 2226,3836.89 ; v1@2218.73,3819.34 ccw(c2201.19,3836.89) 2226,3836.89 ; v1@2218.73,3819.34 ccw(c2201.19,3836.89) 2226,3836.89 ; v1@2218.73,3819.34 ccw(c2201.19,3836.89) 2226,3836.89 ; 2226,3844.48 ccw(c2261.54,3844.48) v1@2236.41,3819.34 ; 2226,3844.48 ccw(c2261.54,3844.48) v1@2236.41,3819.34 ; 2226,3844.48 ccw(c2261.54,3844.48) v1@2236.41,3819.34 ; 2226,3844.48 ccw(c2261.54,3844.48) v1@2236.41,3819.34 ; v1@2266.16,3748.34 ccw(c2242.41,3772.1) 2276,3772.1 ; v1@2266.16,3748.34 ccw(c2242.41,3772.1) 2276,3772.1 ; v1@2266.16,3748.34 ccw(c2242.41,3772.1) 2276,3772.1 ; v1@2266.16,3748.34 ccw(c2242.41,3772.1) 2276,3772.1 ; 2276,3767.27 ccw(c2302.76,3767.27) v1@2283.84,3748.34 ; 2276,3767.27 ccw(c2302.76,3767.27) v1@2283.84,3748.34 ; 2276,3767.27 ccw(c2302.76,3767.27) v1@2283.84,3748.34 ; 2276,3767.27 ccw(c2302.76,3767.27) v1@2283.84,3748.34 ; v1@2317.16,3834.34 ccw(c2295.82,3855.68) 2326,3855.68 ; v1@2317.16,3834.34 ccw(c2295.82,3855.68) 2326,3855.68 ; v1@2317.16,3834.34 ccw(c2295.82,3855.68) 2326,3855.68 ; v1@2317.16,3834.34 ccw(c2295.82,3855.68) 2326,3855.68 ; 2326,3855.68 ccw(c2356.18,3855.68) v1@2334.84,3834.34 ; 2326,3855.68 ccw(c2356.18,3855.68) v1@2334.84,3834.34 ; 2326,3855.68 ccw(c2356.18,3855.68) v1@2334.84,3834.34 ; 2326,3855.68 ccw(c2356.18,3855.68) v1@2334.84,3834.34 ; 3641.31,4232.17 ccw(c3675.06,4232.17) 3651.2,4208.31 ; 3641.31,4232.17 ccw(c3675.06,4232.17) 3651.2,4208.31 ; 3641.31,4232.17 ccw(c3675.06,4232.17) 3651.2,4208.31 ; 3641.31,4232.17 ccw(c3675.06,4232.17) 3651.2,4208.31
  Top Layer w30: 1130,4452.5 1196,4452.5 1256,4392.5 1256,4265.64 ; 1200,4573.5 1305,4468.5 1305,4257.5 ; 1254.5,3589 1207,3541.5 1207,3412.5 1231,3388.5 1280,3388.5 1708,3388.5 ; 1256,3907.37 1256,3587.5 1575,3587.5 1706,3718.5 1706,3907.37 ; 1280,3488.5 1554,3488.5 1649,3583.5 1785,3583.5 1969.13,3399.37 2505.87,3399.37 ; 1306,3907.37 1306,4121.5 1365,4180.5 2323,4180.5 ; 1318.71,4684.13 1318.71,4529.79 1355,4493.5 1355,4265.64 ; 1355,3908.37 1355,3998.5 1359,4002.5 v1(1359,4018.5) ; 1405,4271.5 1405,4535.5 1437.42,4567.92 1437.42,4684.13 ; 1410,3911.37 1409,3912.37 1409,4085.5 v1@1410,4086.5 ; 1455,4284.5 1455,4513.5 1556.13,4614.63 1556.13,4684.13 ; 1459,3910.37 v1@1459,3998.5 ; 1505,4282.5 1505,4493.5 1681,4669.5 1674.84,4669.5 1674.84,4684.13 ; 1506,3907.37 1509,3910.37 1509,4081.5 v1@1506,4084.5 ; 1555,4265.64 1555,4479.5 1625,4549.5 1770,4549.5 1793.55,4573.05 1793.55,4684.13 ; 1558,3909.37 v1@1558,3996.5 ; 1605,4266.5 1605,4460.5 1654,4509.5 1897,4509.5 1912.26,4524.76 1912.26,4684.13 ; 1610,3911.37 v1@1610,4030.5 ; 1655,4275.5 1655,4443.16 1681.34,4469.5 2004,4469.5 2030.97,4496.47 2030.97,4684.13 ; 1656,3907.37 1656,3979.5 1704,4027.5 v1(1739,4027.5) ; 1656,4257.5 1656,4265.64 ; 1706,3830.5 1709,3833.5 2046,3833.5 2076,3863.5 ; 1708,3288.5 1280,3288.5 1214,3288.5 1128,3374.5 1128,4915.5 1198,4985.5 2417.4,4985.5 ; 1708,3488.5 1781,3488.5 1833,3436.5 ; v1(1921,3783.5) 1917,3779.5 1917,3541.5 2011,3447.5 2374,3447.5 v1(2433,3506.5) ; v1@1926,3906.5 v1(1926,4045.5) ; v1(2064,4388.5) 2064,4348.5 2076,4336.5 2076,4265.64 ; 2125,4279.5 2125,4589.83 2149.68,4614.5 2149.68,4684.13 ; 2126,3983.5 2323,4180.5 ; 2175,4288.5 2175,4507.5 2268.39,4600.89 2268.39,4684.13 ; v1(2204,3504.5) 2252,3504.5 2429.43,3681.93 2429.43,3970.93 ; 2225,4284.5 2225,4458.5 2387.1,4620.6 2387.1,4684.13 ; 2275,4275.5 2275,4433.5 2411,4569.5 2482,4569.5 2499,4586.5 2499,4677.33 2505.81,4684.13 ; 2307,4180.5 2323,4180.5 ; 2325,4425.5 2429,4529.5 2599,4529.5 2624.52,4555.02 2624.52,4684.13 ; 2326,4265.64 2326,4425.5 ; 2375,4418.94 2445.57,4489.5 2698,4489.5 2743.22,4534.73 2743.22,4684.13 ; 2376,4265.64 2376,4418.94 ; v1(2377.14,3741.5) 2377.14,3906.23 ; 2417.4,4896.5 2417.4,4985.5 ; 2425,4410.5 2464,4449.5 2810,4449.5 2861.93,4501.44 2861.93,4684.13 ; 2426,4265.64 2426,4410.5 ; 2476,3792.5 2476,3907.37 ; 2476,4314.5 2476,4265.64 2476,4387.5 2498,4409.5 2935,4409.5 2980.64,4455.15 2980.64,4684.13 ; v1@2504,3764.5 2520,3780.5 2666,3780.5 ; 2526,3907.37 2526,3881.5 2573,3834.5 v1(2591,3834.5) ; v1(2739,3176.5) 2789,3226.5 v1(2789,3333.5) ; 2866,3150.5 2866,3328.5 ; v1(2888,3692.5) 2888,3662.5 v1(2973,3577.5) ; 2977.01,3385.5 3082.54,3279.97 3082.54,3188.5 ; v1(3035,4044.5) 3035,4078.21 2932.71,4180.5 2323,4180.5 ; 3071.5,3846.01 3177.5,3740 ; 3099.35,4684.13 3099.35,4430.15 3149,4380.5 3646,4380.5 3692,4334.5 3692,4265.64 ; 3218.06,4684.13 3218.06,4427.44 3225,4420.5 3669,4420.5 3742,4347.5 3742,4265.64 ; 3277.4,4896.5 3277.4,4983.91 ; 3336.77,4684.13 3336.77,4495.73 3372,4460.5 3685.57,4460.5 3792,4354.07 3792,4265.64 ; v1@3376,3376.5 3384.5,3368 3492.5,3368 v1(3545,3315.5) ; 3455.48,4684.13 3455.48,4543.02 3498,4500.5 3717,4500.5 3842,4375.5 3842,4265.64 ; v1(3573,4329.5) 3613,4329.5 3642,4300.5 ; 3574.19,4684.13 3574.19,4566.31 3600,4540.5 3733.57,4540.5 3892,4382.07 3892,4265.64 ; 3692.9,4684.13 3692.9,4637.74 3942,4388.64 3942,4265.64 ; 3811.61,4684.13 3811.61,4578.89 3992,4398.5 3992,4265.64 ; 3930.32,4684.13 3930.32,4534.18 4042,4422.5 4042,4265.64 ; 4049.03,4684.13 4049.03,4536.91 4209.43,4376.5 4363,4376.5 4412,4327.5 4412,4265.64 ; 4092,3907.37 4092,3784.5 4362,3514.5 ; 4167.74,4684.13 4167.74,4474.76 4226,4416.5 4379.57,4416.5 4462,4334.07 4462,4265.64 ; 4257.4,4896.5 4262,4901.1 ; v1@4262,4964.5 4241,4985.5 2417.4,4985.5 ; 4286.45,4684.13 4286.45,4513.05 4343,4456.5 4396.14,4456.5 4512,4340.64 4512,4265.64 ; 4362,3907.37 4362,3514.5 ; 4405.16,4684.13 4405.16,4517.34 4562,4360.5 4562,4265.64 ; 4463,3600.5 4551,3688.5 4680,3688.5 ; 4523.87,4684.13 4523.87,4461.37 4612,4373.24 4612,4265.64 ; 4642.58,4684.13 4642.58,4505.93 4662,4486.5 4662,4265.64 ; 4712,4265.64 4712,4491.5 4749.71,4529.22 4761.29,4529.22 4761.29,4684.13 ; 4762,4265.64 4762,4441.5 4880,4559.5 4880,4684.13 ; 4800,3688.5 4809,3688.5 4809,3597.5 ; 4812,3597.5 4812,3517.5 4724,3429.5 4447,3429.5 4362,3514.5 ; 4812,3688.5 4812,3907.37 ; 1244.93,3288.5 ccw(c1244.93,3323.58) 1269.73,3298.78 ; 1244.93,3288.5 cw(c1244.93,3253.43) 1269.73,3278.23 ; 1244.93,3288.5 ccw(c1244.93,3323.58) 1269.73,3298.78 ; 1244.93,3288.5 cw(c1244.93,3253.43) 1269.73,3278.23 ; 1244.93,3288.5 ccw(c1244.93,3323.58) 1269.73,3298.78 ; 1244.93,3288.5 cw(c1244.93,3253.43) 1269.73,3278.23 ; 1244.93,3288.5 ccw(c1244.93,3323.58) 1269.73,3298.78 ; 1244.93,3288.5 cw(c1244.93,3253.43) 1269.73,3278.23 ; 1244.93,3388.5 ccw(c1244.93,3423.58) 1269.73,3398.78 ; 1244.93,3388.5 cw(c1244.93,3353.43) 1269.73,3378.23 ; 1244.93,3388.5 ccw(c1244.93,3423.58) 1269.73,3398.78 ; 1244.93,3388.5 cw(c1244.93,3353.43) 1269.73,3378.23 ; 1244.93,3388.5 ccw(c1244.93,3423.58) 1269.73,3398.78 ; 1244.93,3388.5 cw(c1244.93,3353.43) 1269.73,3378.23 ; 1244.93,3388.5 ccw(c1244.93,3423.58) 1269.73,3398.78 ; 1244.93,3388.5 cw(c1244.93,3353.43) 1269.73,3378.23 ; 1290.27,3278.23 cw(c1315.07,3253.43) 1315.07,3288.5 ; 1290.27,3278.23 cw(c1315.07,3253.43) 1315.07,3288.5 ; 1290.27,3278.23 cw(c1315.07,3253.43) 1315.07,3288.5 ; 1290.27,3278.23 cw(c1315.07,3253.43) 1315.07,3288.5 ; 1290.27,3298.78 ccw(c1315.07,3323.58) 1315.07,3288.5 ; 1290.27,3298.78 ccw(c1315.07,3323.58) 1315.07,3288.5 ; 1290.27,3298.78 ccw(c1315.07,3323.58) 1315.07,3288.5 ; 1290.27,3298.78 ccw(c1315.07,3323.58) 1315.07,3288.5 ; 1290.27,3378.23 cw(c1315.07,3353.43) 1315.07,3388.5 ; 1290.27,3378.23 cw(c1315.07,3353.43) 1315.07,3388.5 ; 1290.27,3378.23 cw(c1315.07,3353.43) 1315.07,3388.5 ; 1290.27,3378.23 cw(c1315.07,3353.43) 1315.07,3388.5 ; 1290.27,3398.78 ccw(c1315.07,3423.58) 1315.07,3388.5 ; 1290.27,3398.78 ccw(c1315.07,3423.58) 1315.07,3388.5 ; 1290.27,3398.78 ccw(c1315.07,3423.58) 1315.07,3388.5 ; 1290.27,3398.78 ccw(c1315.07,3423.58) 1315.07,3388.5 ; 1290.27,3478.23 cw(c1315.07,3453.43) 1315.07,3488.5 ; 1290.27,3478.23 cw(c1315.07,3453.43) 1315.07,3488.5 ; 1290.27,3478.23 cw(c1315.07,3453.43) 1315.07,3488.5 ; 1290.27,3478.23 cw(c1315.07,3453.43) 1315.07,3488.5 ; 1290.27,3498.78 ccw(c1315.07,3523.58) 1315.07,3488.5 ; 1290.27,3498.78 ccw(c1315.07,3523.58) 1315.07,3488.5 ; 1290.27,3498.78 ccw(c1315.07,3523.58) 1315.07,3488.5 ; 1290.27,3498.78 ccw(c1315.07,3523.58) 1315.07,3488.5 ; 1355,3984.7 cw(c1392.8,3984.7) v1@1366.07,4011.43 ; 1355,3984.7 cw(c1392.8,3984.7) v1@1366.07,4011.43 ; 1355,3984.7 cw(c1392.8,3984.7) v1@1366.07,4011.43 ; 1355,3984.7 cw(c1392.8,3984.7) v1@1366.07,4011.43 ; v1@1399.93,4079.43 cw(c1378.03,4057.53) 1409,4057.53 ; v1@1399.93,4079.43 cw(c1378.03,4057.53) 1409,4057.53 ; v1@1399.93,4079.43 cw(c1378.03,4057.53) 1409,4057.53 ; v1@1399.93,4079.43 cw(c1378.03,4057.53) 1409,4057.53 ; v1@1496.93,4063.43 cw(c1467.79,4034.29) 1509,4034.29 ; v1@1496.93,4063.43 cw(c1467.79,4034.29) 1509,4034.29 ; v1@1496.93,4063.43 cw(c1467.79,4034.29) 1509,4034.29 ; v1@1496.93,4063.43 cw(c1467.79,4034.29) 1509,4034.29 ; 1558,3971.95 cw(c1585.56,3971.95) v1@1566.07,3991.43 ; 1558,3971.95 cw(c1585.56,3971.95) v1@1566.07,3991.43 ; 1558,3971.95 cw(c1585.56,3971.95) v1@1566.07,3991.43 ; 1558,3971.95 cw(c1585.56,3971.95) v1@1566.07,3991.43 ; v1@1600.93,4031.43 cw(c1579.03,4009.53) 1610,4009.53 ; v1@1600.93,4031.43 cw(c1579.03,4009.53) 1610,4009.53 ; v1@1600.93,4031.43 cw(c1579.03,4009.53) 1610,4009.53 ; v1@1600.93,4031.43 cw(c1579.03,4009.53) 1610,4009.53 ; 1645.42,4633.92 ccw(c1595.2,4684.13) 1666.22,4684.13 ; 1645.42,4633.92 ccw(c1595.2,4684.13) 1666.22,4684.13 ; 1645.42,4633.92 ccw(c1595.2,4684.13) 1666.22,4684.13 ; 1645.42,4633.92 ccw(c1595.2,4684.13) 1666.22,4684.13 ; 1662.18,3985.68 cw(c1739,3908.86) v1@1739,4017.5 ; 1662.18,3985.68 cw(c1739,3908.86) v1@1739,4017.5 ; 1662.18,3985.68 cw(c1739,3908.86) v1@1739,4017.5 ; 1662.18,3985.68 cw(c1739,3908.86) v1@1739,4017.5 ; 1672.93,3288.5 ccw(c1672.93,3323.58) 1697.73,3298.78 ; 1672.93,3288.5 cw(c1672.93,3253.43) 1697.73,3278.23 ; 1672.93,3288.5 ccw(c1672.93,3323.58) 1697.73,3298.78 ; 1672.93,3288.5 cw(c1672.93,3253.43) 1697.73,3278.23 ; 1672.93,3288.5 ccw(c1672.93,3323.58) 1697.73,3298.78 ; 1672.93,3288.5 cw(c1672.93,3253.43) 1697.73,3278.23 ; 1672.93,3288.5 ccw(c1672.93,3323.58) 1697.73,3298.78 ; 1672.93,3288.5 cw(c1672.93,3253.43) 1697.73,3278.23 ; 1672.93,3388.5 ccw(c1672.93,3423.58) 1697.73,3398.78 ; 1672.93,3388.5 cw(c1672.93,3353.43) 1697.73,3378.23 ; 1672.93,3388.5 ccw(c1672.93,3423.58) 1697.73,3398.78 ; 1672.93,3388.5 cw(c1672.93,3353.43) 1697.73,3378.23 ; 1672.93,3388.5 ccw(c1672.93,3423.58) 1697.73,3398.78 ; 1672.93,3388.5 cw(c1672.93,3353.43) 1697.73,3378.23 ; 1672.93,3388.5 ccw(c1672.93,3423.58) 1697.73,3398.78 ; 1672.93,3388.5 cw(c1672.93,3353.43) 1697.73,3378.23 ; 1686.5,4010.01 cw(c1716.64,3979.86) v1@1734.75,4018.45 ; 1686.5,4010.01 cw(c1716.64,3979.86) v1@1734.75,4018.45 ; 1686.5,4010.01 cw(c1716.64,3979.86) v1@1734.75,4018.45 ; 1686.5,4010.01 cw(c1716.64,3979.86) v1@1734.75,4018.45 ; 1713.39,4036.9 cw(c1739,4011.29) v1@1739,4047.5 ; 1713.39,4036.9 cw(c1739,4011.29) v1@1739,4047.5 ; 1713.39,4036.9 cw(c1739,4011.29) v1@1739,4047.5 ; 1713.39,4036.9 cw(c1739,4011.29) v1@1739,4047.5 ; 1718.27,3478.23 cw(c1743.07,3453.43) 1743.07,3488.5 ; 1718.27,3478.23 cw(c1743.07,3453.43) 1743.07,3488.5 ; 1718.27,3478.23 cw(c1743.07,3453.43) 1743.07,3488.5 ; 1718.27,3478.23 cw(c1743.07,3453.43) 1743.07,3488.5 ; 1718.27,3498.78 ccw(c1743.07,3523.58) 1743.07,3488.5 ; 1718.27,3498.78 ccw(c1743.07,3523.58) 1743.07,3488.5 ; 1718.27,3498.78 ccw(c1743.07,3523.58) 1743.07,3488.5 ; 1718.27,3498.78 ccw(c1743.07,3523.58) 1743.07,3488.5 ; 1804.35,3288.5 cw(c1804.35,3257.09) 1826.56,3279.3 ; 1804.35,3288.5 cw(c1804.35,3257.09) 1826.56,3279.3 ; 1804.35,3288.5 cw(c1804.35,3257.09) 1826.56,3279.3 ; 1804.35,3288.5 cw(c1804.35,3257.09) 1826.56,3279.3 ; 1917,3749.7 cw(c1954.8,3749.7) v1@1928.07,3776.43 ; 1917,3749.7 cw(c1954.8,3749.7) v1@1928.07,3776.43 ; 1917,3749.7 cw(c1954.8,3749.7) v1@1928.07,3776.43 ; 1917,3749.7 cw(c1954.8,3749.7) v1@1928.07,3776.43 ; v1@1917.93,3901.58 ccw(c1898.44,3921.06) 1926,3921.06 ; v1@1917.93,3901.58 ccw(c1898.44,3921.06) 1926,3921.06 ; v1@1917.93,3901.58 ccw(c1898.44,3921.06) 1926,3921.06 ; v1@1917.93,3901.58 ccw(c1898.44,3921.06) 1926,3921.06 ; 1989.99,4985.5 cw(c1989.99,4896.49) v1@2052.93,4959.43 ; 1989.99,4985.5 cw(c1989.99,4896.49) v1@2052.93,4959.43 ; 1989.99,4985.5 cw(c1989.99,4896.49) v1@2052.93,4959.43 ; 1989.99,4985.5 cw(c1989.99,4896.49) v1@2052.93,4959.43 ; v1@2067.07,4959.43 cw(c2130.01,4896.49) 2130.01,4985.5 ; v1@2067.07,4959.43 cw(c2130.01,4896.49) 2130.01,4985.5 ; v1@2067.07,4959.43 cw(c2130.01,4896.49) 2130.01,4985.5 ; v1@2067.07,4959.43 cw(c2130.01,4896.49) 2130.01,4985.5 ; 2074.09,3861.59 ccw(c2061.78,3873.91) 2079.19,3873.91 ; 2074.09,3861.59 ccw(c2061.78,3873.91) 2079.19,3873.91 ; 2074.09,3861.59 ccw(c2061.78,3873.91) 2079.19,3873.91 ; 2074.09,3861.59 ccw(c2061.78,3873.91) 2079.19,3873.91 ; 2476,3788.99 ccw(c2516.49,3788.99) v1@2487.86,3760.36 ; 2476,3788.99 ccw(c2516.49,3788.99) v1@2487.86,3760.36 ; 2476,3788.99 ccw(c2516.49,3788.99) v1@2487.86,3760.36 ; 2476,3788.99 ccw(c2516.49,3788.99) v1@2487.86,3760.36 ; 2476,3861.42 ccw(c2588.91,3861.42) v1@2509.07,3781.58 ; 2476,3861.42 ccw(c2588.91,3861.42) v1@2509.07,3781.58 ; 2476,3861.42 ccw(c2588.91,3861.42) v1@2509.07,3781.58 ; 2476,3861.42 ccw(c2588.91,3861.42) v1@2509.07,3781.58 ; 2499,4652.59 cw(c2536.17,4652.59) 2509.89,4678.87 ; 2499,4652.59 cw(c2536.17,4652.59) 2509.89,4678.87 ; 2499,4652.59 cw(c2536.17,4652.59) 2509.89,4678.87 ; 2499,4652.59 cw(c2536.17,4652.59) 2509.89,4678.87 ; v1@2509.07,3767.43 cw(c2540.63,3735.88) 2540.63,3780.5 ; v1@2509.07,3767.43 cw(c2540.63,3735.88) 2540.63,3780.5 ; v1@2509.07,3767.43 cw(c2540.63,3735.88) 2540.63,3780.5 ; v1@2509.07,3767.43 cw(c2540.63,3735.88) 2540.63,3780.5 ; 2543.2,3864.3 ccw(c2591,3912.1) v1@2591,3844.5 ; 2543.2,3864.3 ccw(c2591,3912.1) v1@2591,3844.5 ; 2543.2,3864.3 ccw(c2591,3912.1) v1@2591,3844.5 ; 2543.2,3864.3 ccw(c2591,3912.1) v1@2591,3844.5 ; 2855.9,3184.41 cw(c2831.53,3160.03) 2866,3160.03 ; 2855.9,3184.41 cw(c2831.53,3160.03) 2866,3160.03 ; 2855.9,3184.41 cw(c2831.53,3160.03) 2866,3160.03 ; 2855.9,3184.41 cw(c2831.53,3160.03) 2866,3160.03 ; 2855.9,3196.6 ccw(c2831.53,3220.98) 2866,3220.98 ; 2855.9,3196.6 ccw(c2831.53,3220.98) 2866,3220.98 ; 2855.9,3196.6 ccw(c2831.53,3220.98) 2866,3220.98 ; 2855.9,3196.6 ccw(c2831.53,3220.98) 2866,3220.98 ; v1@2898,3692.5 ccw(c2994.57,3692.5) 2926.28,3624.22 ; v1@2898,3692.5 ccw(c2994.57,3692.5) 2926.28,3624.22 ; v1@2898,3692.5 ccw(c2994.57,3692.5) 2926.28,3624.22 ; v1@2898,3692.5 ccw(c2994.57,3692.5) 2926.28,3624.22 ; 2994.1,4119.11 cw(c2919.49,4044.5) v1@3025,4044.5 ; 2994.1,4119.11 cw(c2919.49,4044.5) v1@3025,4044.5 ; 2994.1,4119.11 cw(c2919.49,4044.5) v1@3025,4044.5 ; 2994.1,4119.11 cw(c2919.49,4044.5) v1@3025,4044.5 ; 3045.31,4067.9 cw(c3021.91,4044.5) v1@3055,4044.5 ; 3045.31,4067.9 cw(c3021.91,4044.5) v1@3055,4044.5 ; 3045.31,4067.9 cw(c3021.91,4044.5) v1@3055,4044.5 ; 3045.31,4067.9 cw(c3021.91,4044.5) v1@3055,4044.5 ; 3072.44,3196.6 ccw(c3048.06,3220.98) 3082.54,3220.98 ; 3072.44,3196.6 ccw(c3048.06,3220.98) 3082.54,3220.98 ; 3072.44,3196.6 ccw(c3048.06,3220.98) 3082.54,3220.98 ; 3072.44,3196.6 ccw(c3048.06,3220.98) 3082.54,3220.98 ; 3538.37,4985.5 cw(c3538.37,4940.88) v1@3569.93,4972.43 ; 3538.37,4985.5 cw(c3538.37,4940.88) v1@3569.93,4972.43 ; 3538.37,4985.5 cw(c3538.37,4940.88) v1@3569.93,4972.43 ; 3538.37,4985.5 cw(c3538.37,4940.88) v1@3569.93,4972.43 ; v1@3576.94,4320.31 cw(c3596.98,4273.49) 3633,4309.51 ; v1@3576.94,4320.31 cw(c3596.98,4273.49) 3633,4309.51 ; v1@3576.94,4320.31 cw(c3596.98,4273.49) 3633,4309.51 ; v1@3576.94,4320.31 cw(c3596.98,4273.49) 3633,4309.51 ; v1@3584.07,4972.43 cw(c3615.63,4940.88) 3615.63,4985.5 ; v1@3584.07,4972.43 cw(c3615.63,4940.88) 3615.63,4985.5 ; v1@3584.07,4972.43 cw(c3615.63,4940.88) 3615.63,4985.5 ; v1@3584.07,4972.43 cw(c3615.63,4940.88) 3615.63,4985.5 ; 4219.96,4985.5 cw(c4219.96,4937.46) v1@4253.93,4971.43 ; 4219.96,4985.5 cw(c4219.96,4937.46) v1@4253.93,4971.43 ; 4219.96,4985.5 cw(c4219.96,4937.46) v1@4253.93,4971.43 ; 4644.93,3688.5 ccw(c4644.93,3723.58) 4669.73,3698.78 ; 4644.93,3688.5 cw(c4644.93,3653.43) 4669.73,3678.23 ; 4644.93,3688.5 ccw(c4644.93,3723.58) 4669.73,3698.78 ; 4644.93,3688.5 cw(c4644.93,3653.43) 4669.73,3678.23 ; 4644.93,3688.5 ccw(c4644.93,3723.58) 4669.73,3698.78 ; 4644.93,3688.5 cw(c4644.93,3653.43) 4669.73,3678.23 ; 4644.93,3688.5 ccw(c4644.93,3723.58) 4669.73,3698.78 ; 4644.93,3688.5 cw(c4644.93,3653.43) 4669.73,3678.23 ; 4789.73,3578.23 cw(c4735.96,3524.46) 4812,3524.46 ; 4789.73,3578.23 cw(c4735.96,3524.46) 4812,3524.46 ; 4789.73,3578.23 cw(c4735.96,3524.46) 4812,3524.46 ; 4789.73,3578.23 cw(c4735.96,3524.46) 4812,3524.46 ; 4789.73,3598.78 ccw(c4743.2,3645.3) 4809,3645.3 ; 4789.73,3598.78 ccw(c4743.2,3645.3) 4809,3645.3 ; 4789.73,3598.78 ccw(c4743.2,3645.3) 4809,3645.3 ; 4789.73,3598.78 ccw(c4743.2,3645.3) 4809,3645.3 ; 4789.73,3678.23 cw(c4743.2,3631.7) 4809,3631.7 ; 4789.73,3678.23 cw(c4743.2,3631.7) 4809,3631.7 ; 4789.73,3678.23 cw(c4743.2,3631.7) 4809,3631.7 ; 4789.73,3678.23 cw(c4743.2,3631.7) 4809,3631.7 ; 4789.73,3698.78 ccw(c4735.96,3752.55) 4812,3752.55 ; 4789.73,3698.78 ccw(c4735.96,3752.55) 4812,3752.55 ; 4789.73,3698.78 ccw(c4735.96,3752.55) 4812,3752.55 ; 4789.73,3698.78 ccw(c4735.96,3752.55) 4812,3752.55